# Altium PCB PCB.PcbDoc
Units mm, origin at the board's own origin, x right, y up, seen from the top; angles counter-clockwise.
Board outline 26.6 x 21.1 mm, 2 copper layers (Top Layer, Bottom Layer), stack 1.581 mm thick; 2 components, 5 nets, 28 pads, 3 vias.
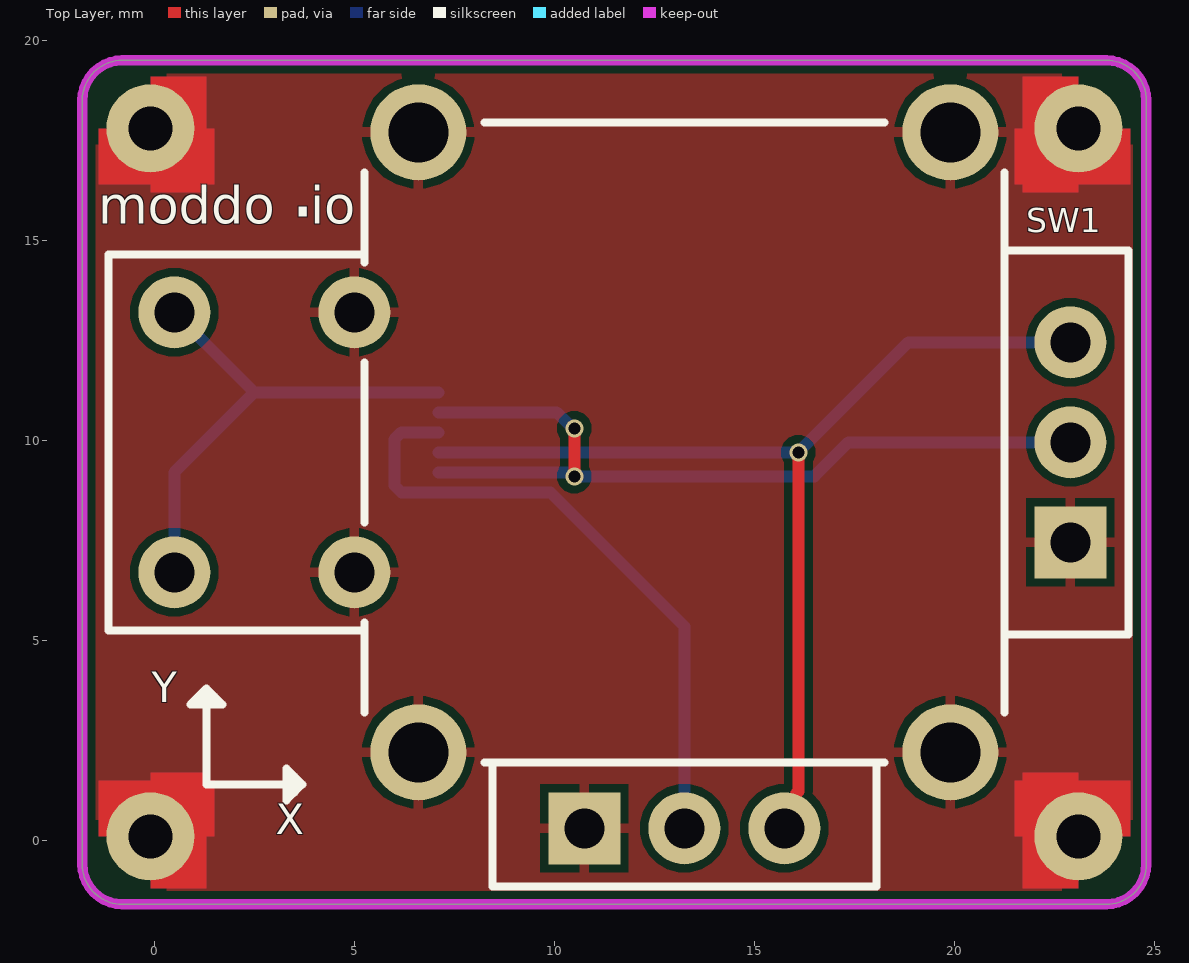
[diagram p0: Top Layer view]
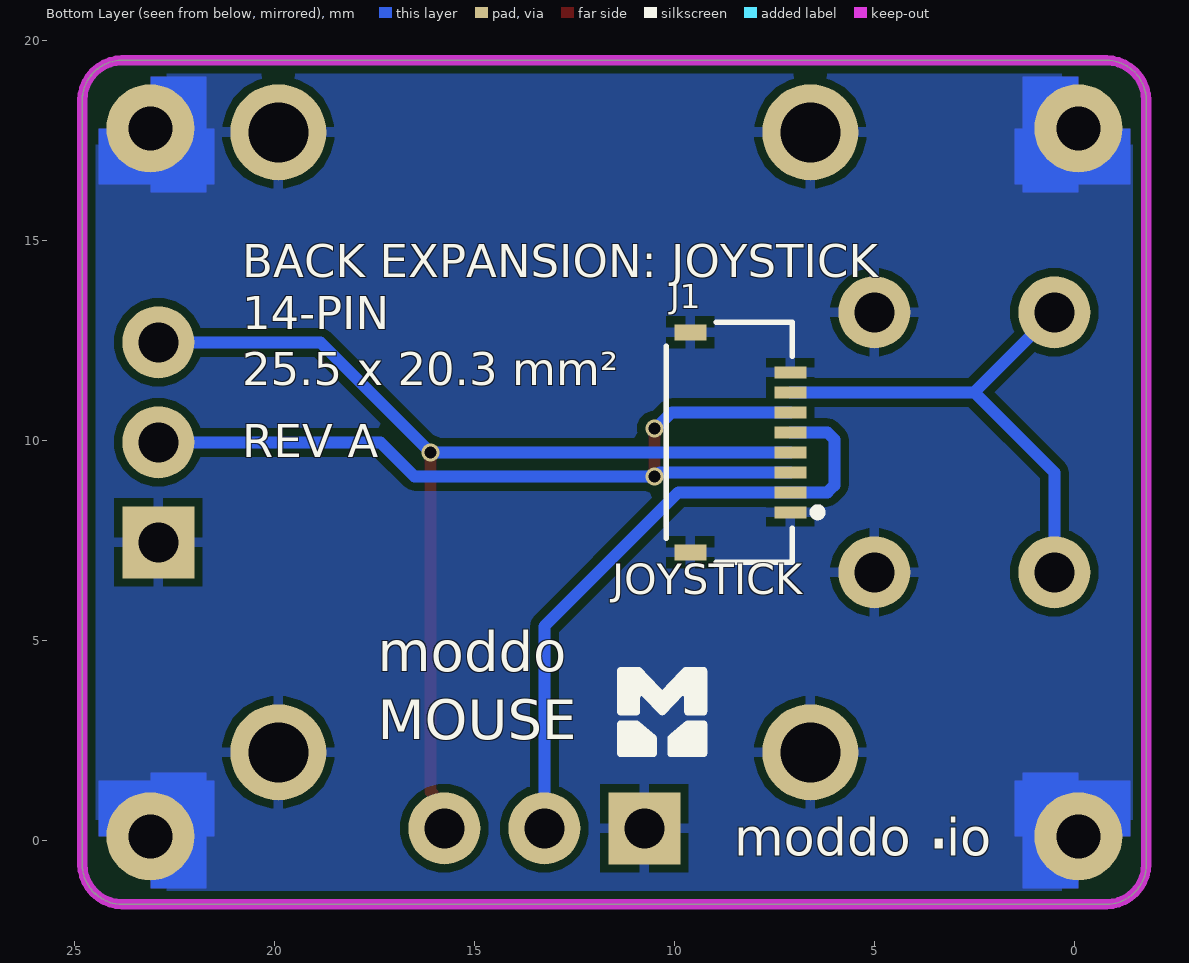
[diagram p1: Bottom Layer view, seen from below]

## Layer stack, top to bottom
Top Solder: solder mask 0.0102, Solder Resist, Dk 3.5
Top Layer: signal copper 0.0356
Dielectric 1: dielectric 1.51, FR-4, Dk 4.8
Bottom Layer: signal copper 0.0356
Bottom Solder: solder mask 0.0102, Solder Resist, Dk 3.5

## Board outline
-0.8,-1.6 cw(c-0.8,-0.6) -1.8,-0.6 -1.8,18.5 cw(c-0.8,18.5) -0.8,19.5 23.8,19.5 cw(c23.8,18.5) 24.8,18.5 24.8,-0.6 cw(c23.8,-0.6) 23.8,-1.6

## Design rules (kind name [scope] priority, off if disabled: settings)
BoardOutlineClearance [All] p1: gap=0.2 ignorepadtopadclearanceinfootprint=FALSE
Clearance GND_bot [InNamedPolygon('GND_bot')] p1: gap=0.2 ignorepadtopadclearanceinfootprint=FALSE
Clearance GND_top [InNamedPolygon('GND_top')] p2: gap=0.1 ignorepadtopadclearanceinfootprint=FALSE
Clearance [All] p3: gap=0.2 ignorepadtopadclearanceinfootprint=FALSE
HoleSize [All] p1: absolutevalues=TRUE maxlimit=20 minlimit=0.025 maxpercent=80.000 minpercent=20.000
MinimumSolderMaskSliver [All] p1: minsoldermaskwidth=0.05
PolygonConnect [All] p1: thpad.connectstyle=Relief thpad.reliefconductorwidth=0.254 thpad.reliefentries=4 thpad.polygonreliefangle="90 Angle" thpad.airgapwidth=0.2 smdpad.connectstyle=Relief smdpad.reliefconductorwidth=0.254 smdpad.reliefentries=4 smdpad.polygonreliefangle="90 Angle" smdpad.airgapwidth=0.2 via.connectstyle=Direct via.reliefconductorwidth=0.254 via.reliefentries=4 via.polygonreliefangle="90 Angle" via.airgapwidth=0.254
RoutingVias [All] p1: holewidth=0.3 width=0.4 viastyle="Through Hole" minholewidth=0.3 minwidth=0.4 maxholewidth=2 maxwidth=10
SilkToSilkClearance [All] p1: silktosilkclearance=0.01
SilkToSolderMaskClearance [IsPad] p1: minsilkscreentomaskgap=0.001 clearancetoexposedcopper=TRUE
SolderMaskExpansion [All] p1: expansion=0.05 istentingtop=FALSE
SupplyNets "Schematic Supply Nets" [InNet('VDD')] p1: voltage=0.000
SupplyNets "Schematic Supply Nets_1" [InNet('GND')] p2: voltage=0.000
UnRoutedNet [All] p1: checkbadconnections=TRUE
Width [All] p1: maxlimit=2.54 minlimit=0.089 preferedwidth=0.254
25 further rules are at their usual default settings.

## Components (designator, comment, footprint, x,y, rotation, side; value= is the part's Value field where it differs from the comment)
J1 "2328702-8" 2328702-8 10.45,9.95 r270 bottom
SW1 "YK16S-L7.2-B10Ka(32-8)-G-A29" Joystick_14p_25_5mm_20_3mm 13.25,9.95 r0 top

## Footprints (in the part's own frame and the unit in brackets; to place one, negate y for a bottom-side part, rotate by r counter-clockwise, add the part's x,y. Pads: shape width x height; smd on the part's side, far side on the other; paste and mask are expansions set on the pad)
2328702-8 [mm]
  rect 0.3x0.8 smd mask+0.05: 1(1.75,3.35) 2(1.25,3.35) 3(0.75,3.35) 4(0.25,3.35) 5(-0.25,3.35) 6(-0.75,3.35) 7(-1.25,3.35) 8(-1.75,3.35)
  rect 0.4x0.8 smd mask+0.05: S1(2.75,0.85) S2(-2.75,0.85)
  silkscreen extent -3,0.25 3,4.13, body extent -3,0.25 3,4.08, height 1.06
Joystick_14p_25_5mm_20_3mm [mm]
  rect 1.8x1.8 hole 1: 1(-2.5,-9.65) 4(9.65,-2.5)
  round 1.8 hole 1: 2(0,-9.65) 3(2.5,-9.65) 5(9.65,0) 6(9.65,2.5) 7(-12.75,-3.25) 7(-12.75,3.25) 8(-8.25,-3.25) 8(-8.25,3.25)
  round 2.4 hole 1.5: 9(-6.65,7.75) 10(6.65,7.75) 11(6.65,-7.75) 12(-6.65,-7.75)
  silkscreen extent -14.4,-11.1 11.1,8, body extent -14.3,-11.5 11.5,9, height 18.8

## Part data
J1: "FFC/FPC Connector, 8 Contact(s), 1 Row(s), Right Angle, Solder Terminal, Natural Insulator", Actuator Color=Black, Flammability Rating="UL94 V-0", Housing Color=Natural, Manufacturer="TE Connectivity", Max Operating Temperature=85°C, Min Operating Temperature=-40°C, Operating Supply Voltage=50V, Actuator Material=Thermoplastic, Category="FFC / FPC", ComponentLink1Description=https://www.te.com/commerce/DocumentDelivery/DDEController?Action=srchrtrv&amp;DocNm=2328702&amp;DocType=Customer+Drawing&amp;DocLang=English&src-supplier=Digikey, ComponentLink1URL=https://www.te.com/commerce/DocumentDelivery/DDEController?Action=srchrtrv&amp;DocNm=2328702&amp;DocType=Customer+Drawing&amp;DocLang=English&src-supplier=Digikey, Connector System=Wire-to-Board, Contact Material="Copper Alloy", Contact Plating=Gold, Gender=Receptacle, Height=1mm, Housing Material=Thermoplastic, Length=6mm, Manufacturer Part Number=2328702-8, Mounting Technology="Surface Mount", Number of Contacts=8, Number of Positions=8, Number of Rows=1, Orientation="Right Angle", Packaging="Cut Tape", Plating=Gold, Pricing 1="28000=0.0961 (USD)", RoHS=Yes, Sealable="No (Without)", Series=-, Stock 1=56000, Supplier 1="Arrow Electronics", Supplier Part Number 1=2328702-8, Termination=Solder, Voltage Rating=50V
SW1: "Through Hole-14P,25.5x20.3mm Navigation Switches, Joystick RoHS", Manufacturer=YTL, Manufacturer Part Number=YK16S-L7.2-B10Ka(32-8)-G-A29

## Free pads (board coordinates)
  round 2.2 hole 1.1: ""(-0.1,0.1) ""(-0.1,17.8) ""(23.1,0.1) ""(23.1,17.8)

## Via types
v1: diameter 0.45, hole 0.3, Top Layer to Bottom Layer, tented both sides, 3 vias

## Nets (pads, with @x,y where several pads share a name; then routed paths per layer and width w, separated by ;. In a path a pad name is that pad's centre, name@x,y a point inside that pad or via, vN(x,y) a via of type N, cw(c..) or ccw(c..) an arc to the next point about the centre after c; other vN are vias at no path point)
GND: J1.1 J1.8 J1.S1 J1.S2 pad. SW1.1 SW1.4 SW1.8 SW1.9 SW1.10 SW1.11 SW1.12
PRESS_CLICK: J1.7 SW1.7 | length 12.8
  Bottom Layer w0.3: SW1.7@0.5,6.7 0.5,9.2 2.5,11.2 ; SW1.7@0.5,13.2 2.5,11.2 ; J1.7 2.5,11.2
VDD: J1.4 SW1.3 SW1.6 | length 26.5
  Top Layer w0.3: SW1.3 16.037,0.587 16.037,1.163 16.1,1.226 v1(16.1,9.7)
  Bottom Layer w0.3: J1.4 v1(16.1,9.7) 18.85,12.45 SW1.6
X_ADC: J1.2 J1.5 SW1.2 | length 16.1
  Bottom Layer w0.3: J1.5 6.176,10.2 6,10.024 6,8.876 6.176,8.7 J1.2 9.9,8.7 13.25,5.35 SW1.2
Y_ADC: J1.3 J1.6 SW1.5 | length 21
  Top Layer w0.3: v1(10.5,9.1) v1(10.5,10.3)
  Bottom Layer w0.3: J1.3 10.359,9.2 10.459,9.1 v1(10.5,9.1) 16.5,9.1 17.35,9.95 SW1.5 ; J1.6 10.059,10.7 10.459,10.3 v1(10.5,10.3)

## Polygon pours and split planes (outlines as drawn)
GND on Top Layer "GND_L01_P000" (solid, pour order 0): -0.8,-1.6 cw(c-0.8,-0.6) -1.8,-0.6 -1.8,18.5 cw(c-0.8,18.5) -0.8,19.5 23.8,19.5 cw(c23.8,18.5) 24.8,18.5 24.8,-0.6 cw(c23.8,-0.6) 23.8,-1.6
GND on Bottom Layer "GND_L02_P001" (solid, pour order 1): -0.8,-1.6 cw(c-0.8,-0.6) -1.8,-0.6 -1.8,18.5 cw(c-0.8,18.5) -0.8,19.5 23.8,19.5 cw(c23.8,18.5) 24.8,18.5 24.8,-0.6 cw(c23.8,-0.6) 23.8,-1.6

## Keep-outs
Keep-Out Layer:
  the board outline again, w0.254

## Other copper
Top Layer:
  rectangle net GND: -1.4,0.1 1.5,1.5
  region net GND: 1.3,-1.2 1.3,1.7 -0.1,1.7 -0.1,-1.2
  region net GND: 24.4,1.5 21.5,1.5 21.5,0.1 24.4,0.1
  region net GND: 23.1,-1.2 23.1,1.7 21.7,1.7 21.7,-1.2
  region net GND: 24.4,17.8 21.5,17.8 21.5,16.4 24.4,16.4
  region net GND: 21.7,19.1 21.7,16.2 23.1,16.2 23.1,19.1
  region net GND: -0.1,19.1 -0.1,16.2 1.3,16.2 1.3,19.1
  rectangle net GND: -1.4,16.4 1.5,17.8
Bottom Layer:
  region net GND: 21.7,19.1 21.7,16.2 23.1,16.2 23.1,19.1
  region net GND: 24.4,17.8 21.5,17.8 21.5,16.4 24.4,16.4
  region net GND: 23.1,-1.2 23.1,1.7 21.7,1.7 21.7,-1.2
  region net GND: 24.4,1.5 21.5,1.5 21.5,0.1 24.4,0.1
  region net GND: 1.3,-1.2 1.3,1.7 -0.1,1.7 -0.1,-1.2
  rectangle net GND: -1.4,0.1 1.5,1.5
  rectangle net GND: -1.4,16.4 1.5,17.8
  region net GND: -0.1,19.1 -0.1,16.2 1.3,16.2 1.3,19.1

## Silkscreen, mask and mechanical layers (free items; w line width, h text height)
Top Overlay:
  lines w0.2: 1.1,3.5 1.5,3.5 ; 1.1,3.6 1.5,3.6 ; 3.4,1.2 3.4,1.6 ; 3.5,1.2 3.5,1.6 ; 1.3,3.8 1.3,1.4 3.7,1.4 ; 1.3,3.8 1.7,3.4 0.9,3.4 1.3,3.8 ; 3.7,1.4 3.3,1.8 3.3,1 3.7,1.4
  text "moddo" at -1.4,15.1 h1.6
  text "." at 3.4,15.1 h2.5
  text "io" at 3.9,15.1 h1.6
  text "Y" at -0.058,3.2 h1.3
  text "X" at 3.042,-0.1 h1.3
Bottom Overlay:
  drawing of 3 lines, arcs and shapes, not listed
  text "BACK EXPANSION: JOYSTICK" at 20.8,13.8 h1.4
  text "14-PIN / 25.5 x 20.3 mm²" at 20.8,11.1 h1.4
  text "REV A" at 20.8,9.3 h1.4
  text "JOYSTICK" at 11.556,5.9 h1.3
  text "moddo / MOUSE" at 17.418,2.196 h1.7
  text "io" at 3.2,-0.7 h1.6
  text "." at 3.7,-0.7 h2.5
  text "moddo" at 8.5,-0.7 h1.6